# Allegro board LinkingInterfaceV2_1.brd
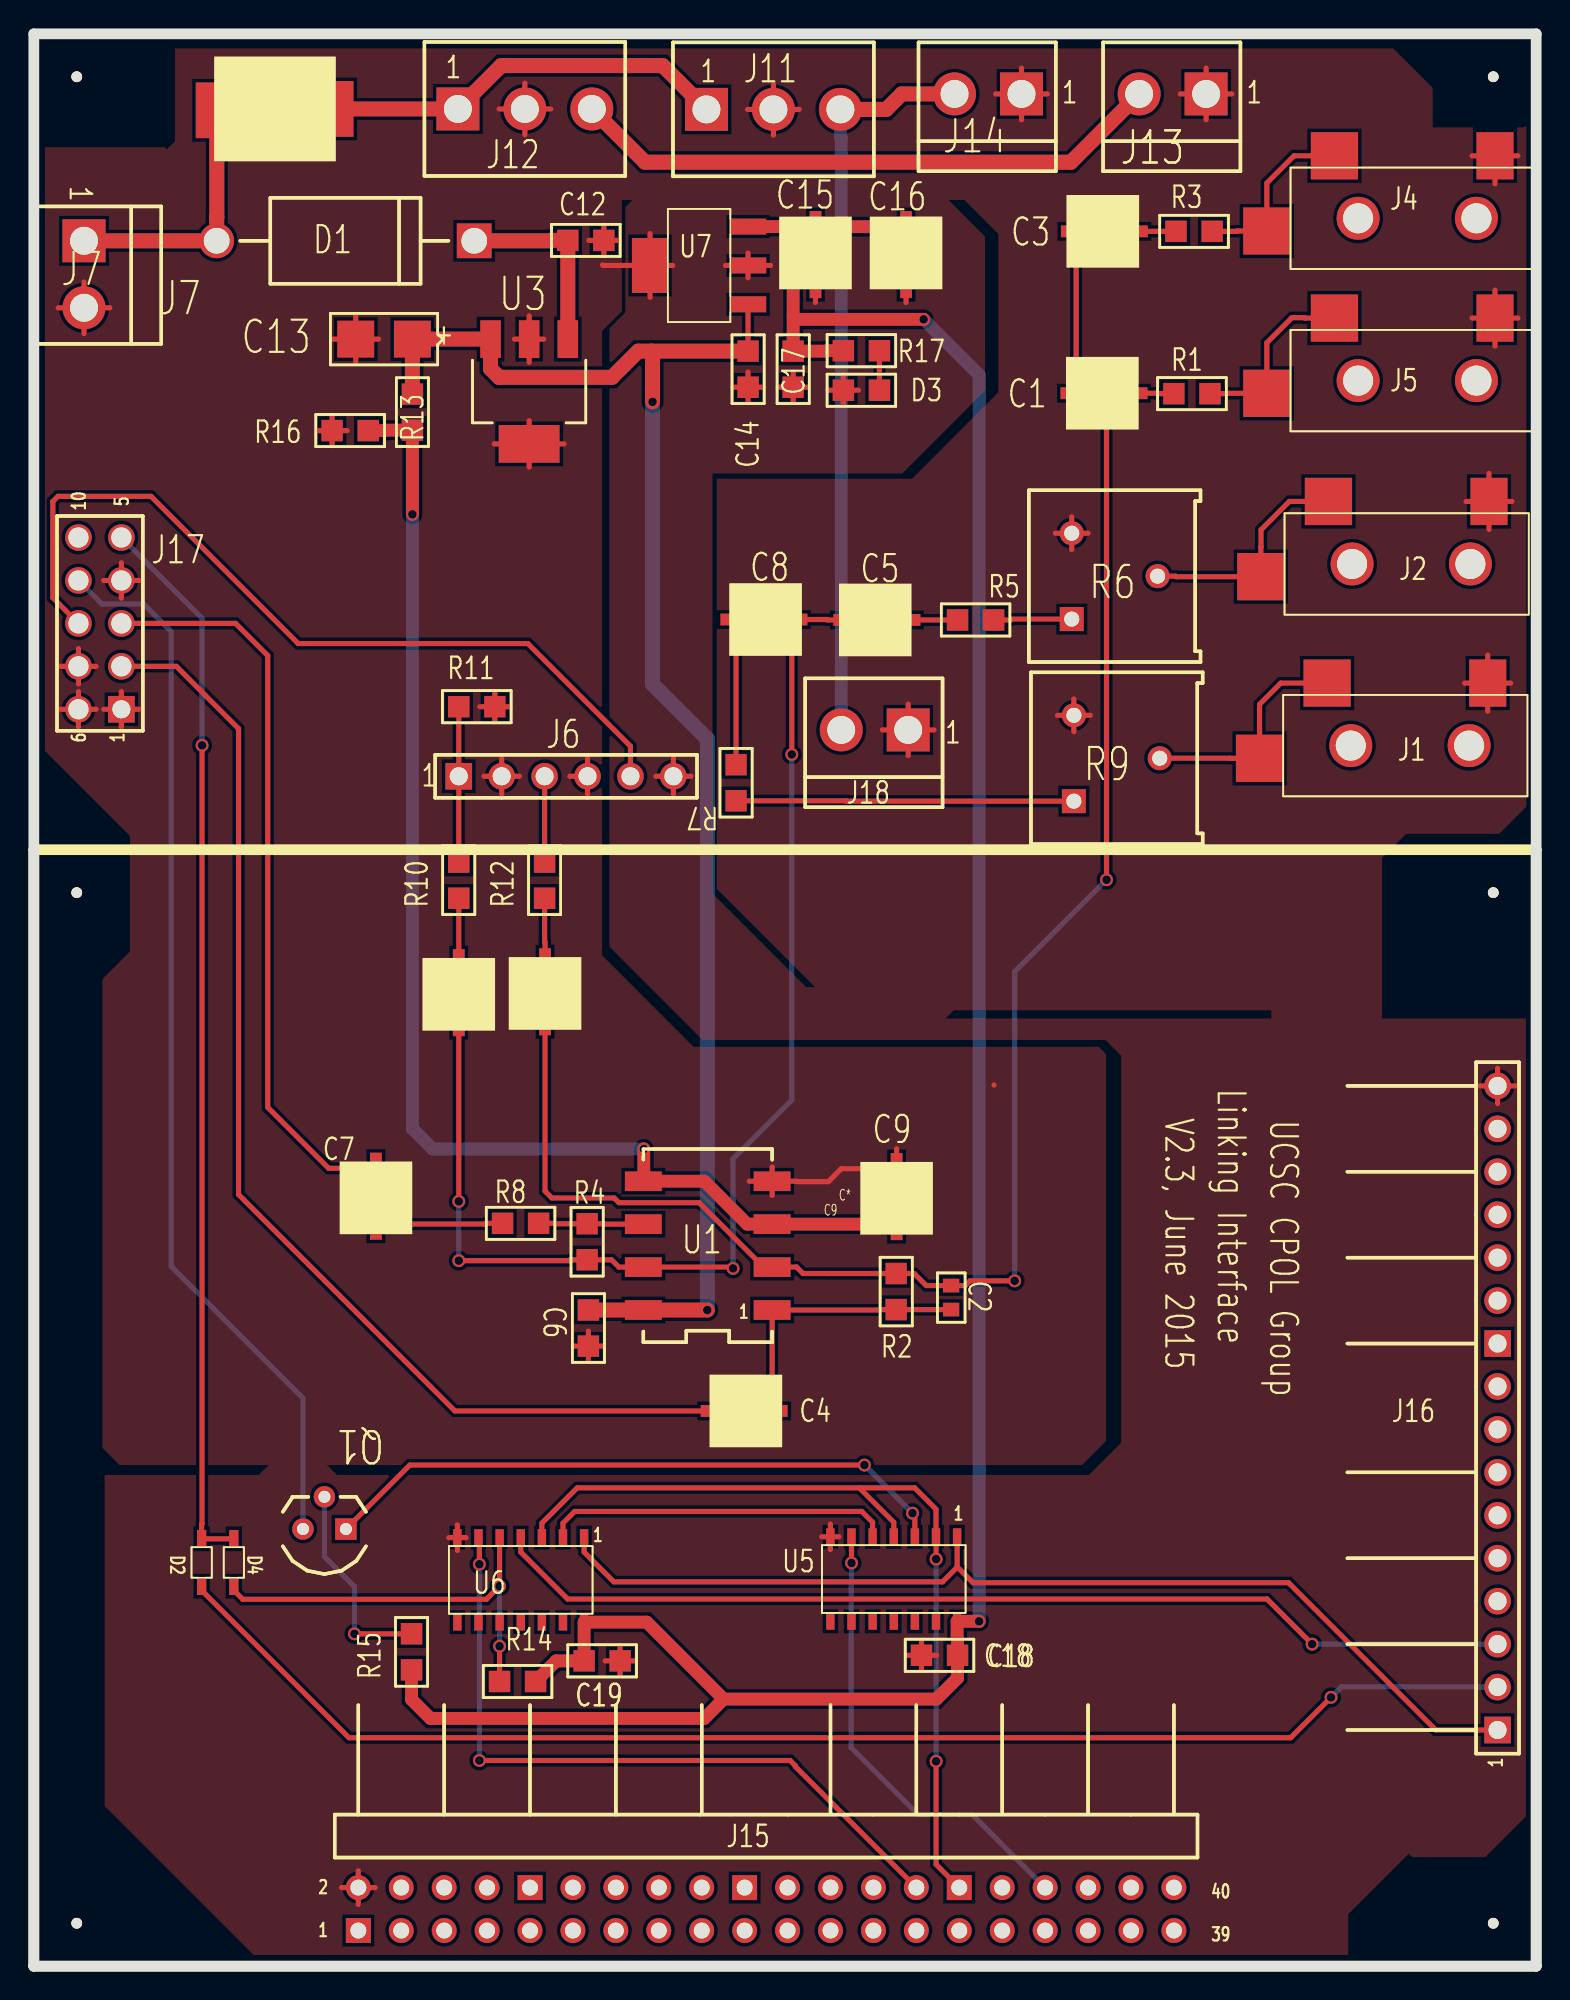
[diagram p0: board, top side]
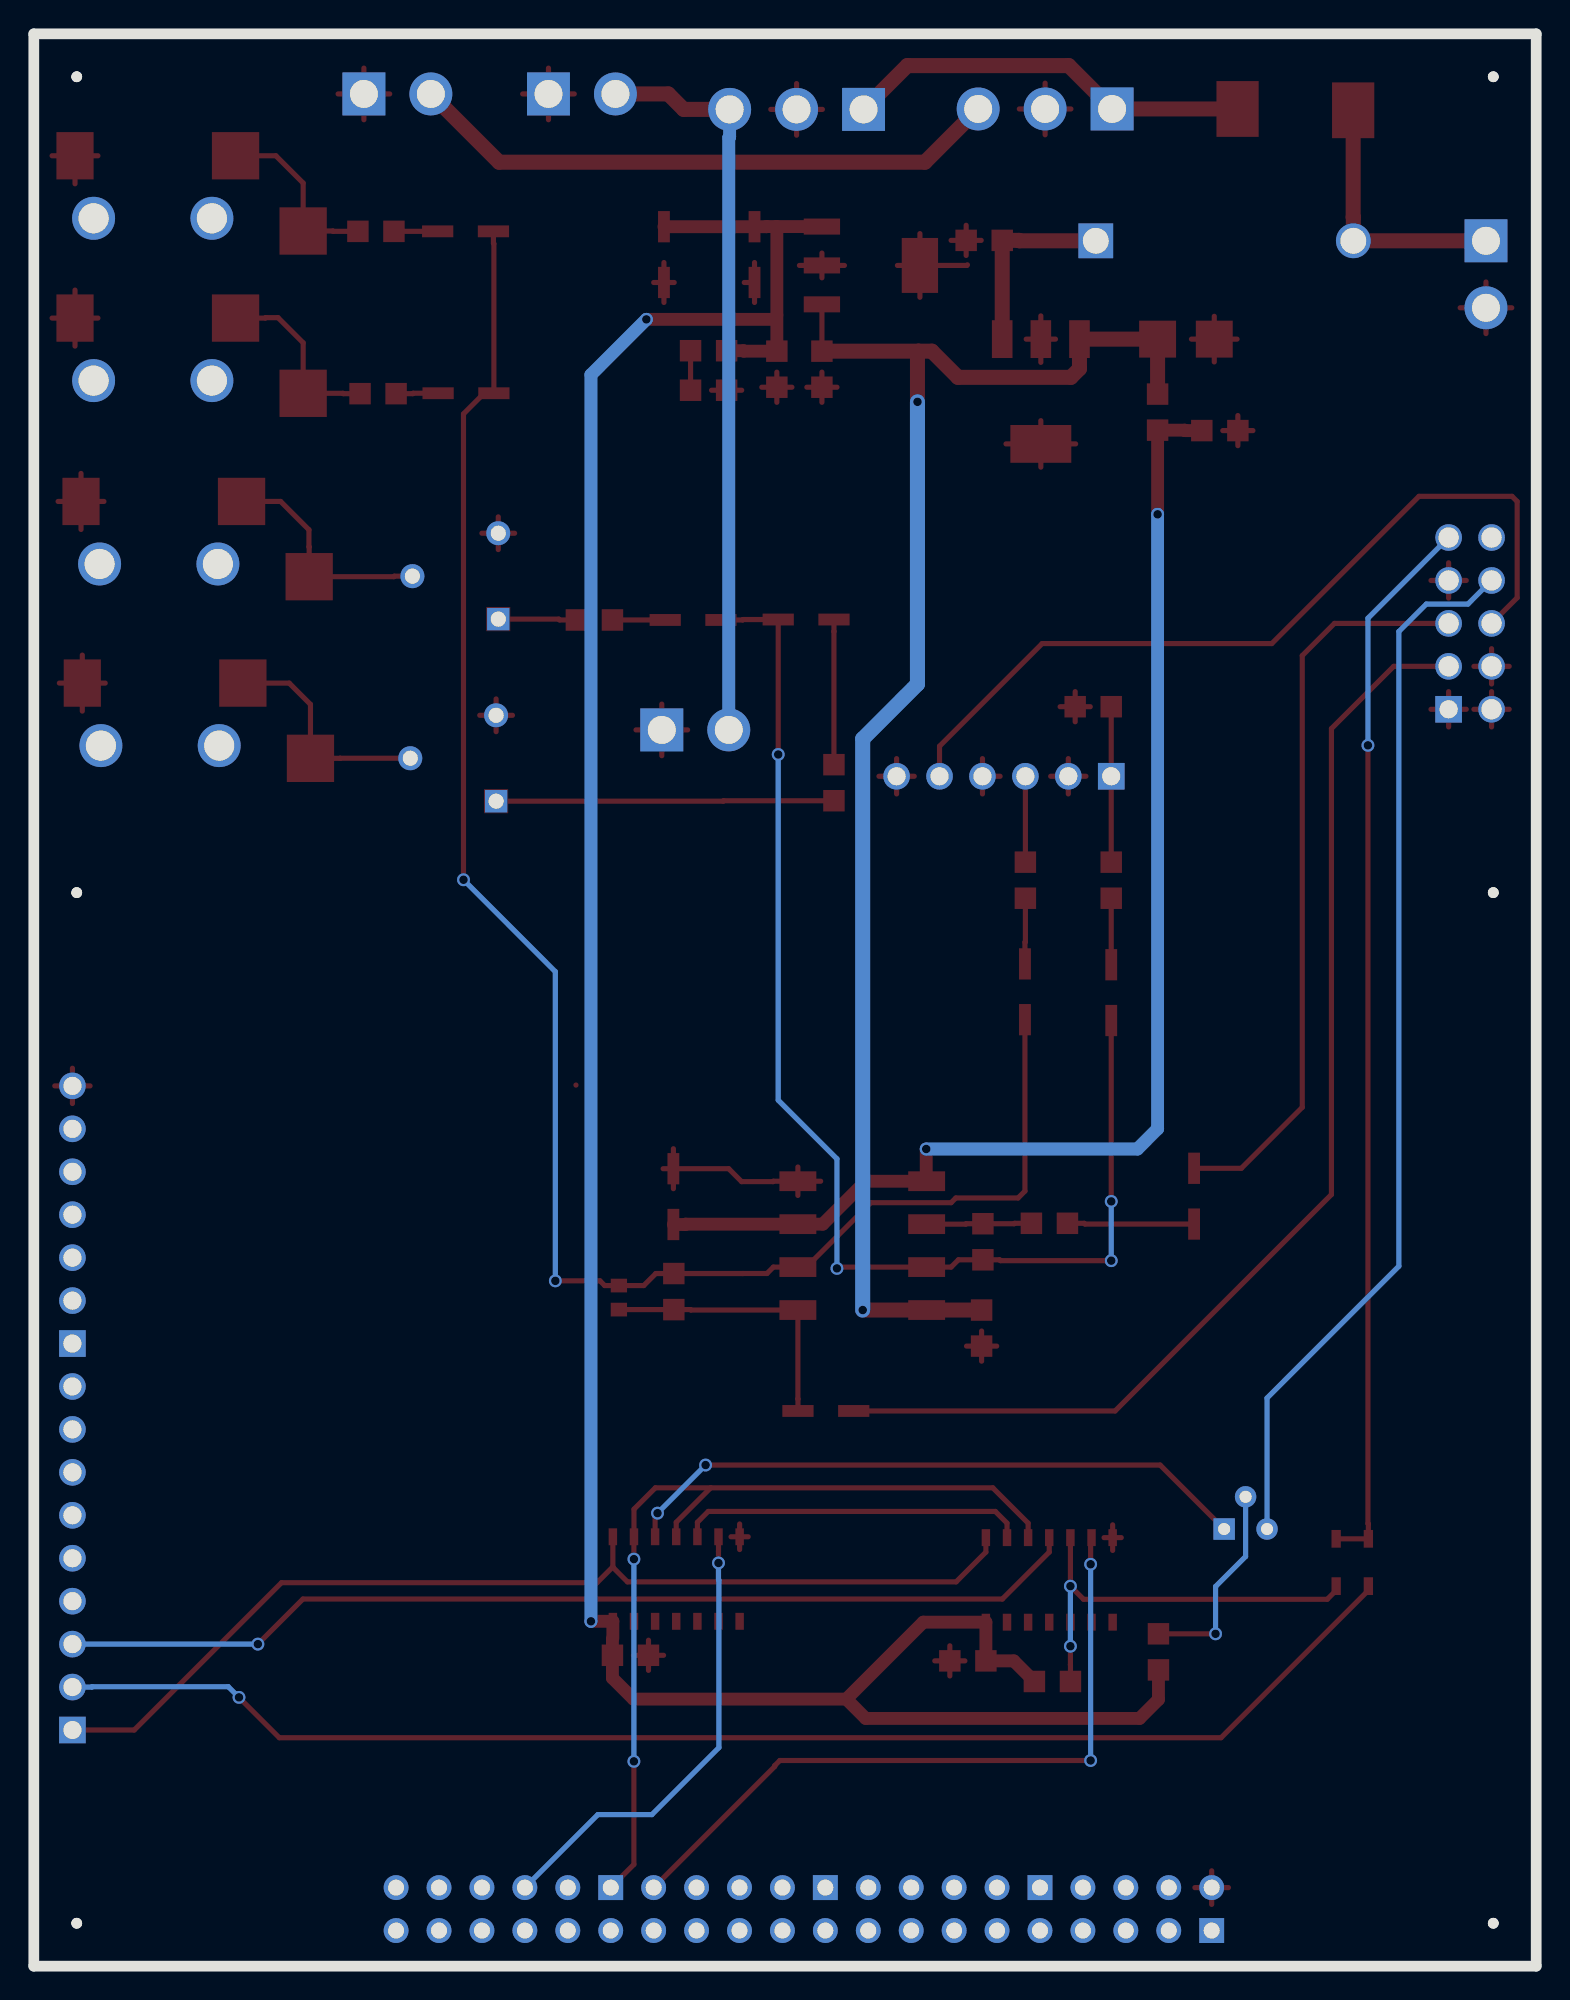
[diagram p1: board, bottom side, seen from below]

Outline 88.9 x 114.3 mm; copper layers: TOP, BOTTOM. Coordinates in mm from the lower left corner of the outline.
Outline path: rectangle 0,0 88.9,114.3 ; 0,114.3 0,0 88.9,0 88.9,114.3 0,114.3

## Placement (name value [footprint] x y rotation side)
C1  10uF  [1_UF_CAP]  61.98 93.04 270 top
C2  100pF  [SMC0603]  54.28 38.84 90 top
C3  10uF  [1_UF_CAP]  62 102.62 270 top
C4  10uF  [1_UF_CAP]  43.38 32.84 90 top
C5  10uF  [1_UF_CAP]  48.54 79.63 270 top
C6  100nF  [SMC0805]  32.82 36.68 90 top
C7  1uF  [1_UF_CAP]  20.24 44.2 0 top
C8  10uF  [1_UF_CAP]  44.55 79.65 90 top
C9  4.7uF  [1_UF_CAP]  51.05 44.17 0 top
C10  10uF  [1_UF_CAP]  25.15 56.24 0 top
C11  10uF  [1_UF_CAP]  30.25 56.29 0 top
C12  470nF  [SMC0805]  31.6 102.08 0 top
C13  22uF/Tant  [EIAB_SMCT3528_12]  22.4 96.24 180 top
C14  100nF  [SMC0805]  42.27 93.4 90 top
C15  10uF  [1_UF_CAP]  46.25 102.59 180 top
C16  10uF  [1_UF_CAP]  51.61 102.59 180 top
C17  100nF  [SMC0805]  44.93 93.4 90 top
C18  100nF  [SMC0805]  52.53 18.39 0 top
C19  100nF  [SMC0805]  32.56 18.06 0 top
D1  SB1245  [DAX600_60D]  10.82 102.06 0 top
D2  1N4148  [1N4148_SOD523]  11.84 22.48 0 top
D3  RED  [SMR0805]  50.04 93.22 180 top
D4  1N4148  [1N4148_SOD523]  9.93 22.48 0 top
D5  -  [B320]  10.87 109.86 0 top
J1  TX_Echo  [35MMJACK]  86.51 97.54 0 top
J2  TX_Allstar  [35MMJACK]  86.51 107.14 0 top
J4  RX_Echo  [35MMJACK]  86.16 86.69 0 top
J5  Rx_Allstar  [35MMJACK]  86.08 75.95 0 top
J6  HEADER 6  [BLKCON100VHTM1SQSW1006]  25.15 70.38 0 top
J7  0.156 VH  [BLKCON156_VHTM1SQ_SW156_2]  2.97 102.06 270 top
J11  HEADER 3  [BLKCON156VHTM1SQSW3123]  39.8 109.83 0 top
J12  HEADER 3  [BLKCON156VHTM1SQSW3123]  25.1 109.86 0 top
J13  0.156 VH  [BLKCON156_VHTM1SQ_SW156_2]  69.37 110.74 180 top
J14  0.156 VH  [BLKCON156_VHTM1SQ_SW156_2]  58.45 110.74 180 top
J15  HEADER 20X2  [BLKCON100RHTM2OEW52540]  19.2 2.11 0 top
J16  HEADER 16  [BLKCON100RHTM1SQSW35016]  86.61 13.97 90 top
J17  HEADER 9  [BCON2DB9_5X2V_100S_42D]  5.18 74.35 90 top
J18  0.156 VH  [BLKCON156_VHTM1SQ_SW156_2]  51.74 73.13 180 top
NOREF  -  [unnamed]  86.36 111.76 180 bottom
NOREF#2  -  [unnamed]  86.36 63.5 180 bottom
NOREF#3  -  [unnamed]  86.36 2.54 180 bottom
NOREF#4  -  [unnamed]  2.54 63.5 180 bottom
NOREF#5  -  [unnamed]  2.54 2.54 180 bottom
NOREF#6  -  [unnamed]  2.54 111.76 180 bottom
Q1  2N2222  [TO92R100]  17.2 25.86 180 top
R1  51k  [SMR0805]  67.46 93.01 0 top
R2  51k  [SMR0805]  51.03 38.84 90 top
R3  51k  [SMR0805]  67.59 102.62 0 top
R4  51k  [SMR0805]  32.74 43.92 270 top
R5  7.5k  [SMR0805]  54.66 79.63 0 top
R6  10k  [VRES18_35D]  63.96 82.22 90 top
R7  7.5k  [SMR0805]  41.55 71.07 270 top
R8  51k  [SMR0805]  27.74 43.94 0 top
R9  10k  [VRES18_35D]  64.08 71.45 90 top
R10  7.5k  [SMR0805]  25.15 63.17 90 top
R11  10k  [SMR0805]  27.28 74.5 180 top
R12  51k  [SMR0805]  30.23 63.17 90 top
R13  51k  [SMR0805]  22.4 90.86 90 top
R14  10k  [SMR0805]  27.56 16.84 0 top
R15  10k  [SMR0805]  22.35 17.53 90 top
R16  51k  [SMR0805]  17.65 90.83 0 top
R17  330  [SMR0805]  50.04 95.55 180 top
U1  TL072  [DIP100B8W300L450]  43.69 38.81 90 top
U3  LM2940 / SOT223  LDO  [SOT223_1234]  31.6 96.24 180 top
U5  74HC08  [74HC0]  54.64 25.4 180 top
U6  74HC04  [74HC0]  32.56 25.35 180 top
U7  LM2936/SO_5  [LM2936_SOT]  42.32 98.3 90 top

## Library data of the parts
C1 C3 C7 C11 = CAPACITOR POL
C2 C6 C12 C14 C17-C19 = C NP
C4 C5 C8-C10 C15 C16 = CAP POL
C13 = C POL
D1 D5 = DIODE SCHOTTKY_0
D2 D4 = 1N4148
D3 = LED
J1 J2 J4 J5 = PHONE JACK-3_2
J6 = HEADER 6
J7 J13 J14 J18 = HEADER 2_4
J11 J12 = HEADER 3
J15 = HEADER 20X2
J16 = HEADER 16
J17 = HEADER 9
Q1 = 2N2222
R1-R5 R7 R8 R10-R17 = RESISTOR
R6 R9 = POT
U1 = TL072_0
U3 = 78L05/TO92_0
U5 = 74HC08_4
U6 = 74HC04_5
U7 = LM2936/SO_13

## Footprints (pads in the part's own frame, mm; a bottom-side part is the same pattern mirrored in y, then rotated)
1_UF_CAP
  rect 0.701x1.849 smd: 1(0,-0.3) 2(0,3)
1N4148_SOD523
  rect 0.551x1.049 smd: 1(0,0) 2(0,2.799)
35MMJACK
  round 2.54 hole 1.778: (-8.151,-3.749) (-1.151,-3.749)
  rect 2.2x2.799 smd: 1(-0.051,-0.051)
  rect 2.799x2.799 smd: 2(-9.55,-0.051) 3(-13.551,-4.501)
74HC0
  rect 0.5x1.001 smd: 1(0,0) 2(1.25,0) 3(2.499,0) 4(3.749,0) 5(5.001,0) 6(6.251,0) 7(7.501,0) 8(7.501,5.001) 9(6.251,5.001) 10(5.001,5.001) 11(3.749,5.001) 12(2.499,5.001) 13(1.25,5.001) 14(0,5.001)
B320
  rect 2.499x3.299 smd: 1(-0.041,-0.079) 2(6.8,0)
BCON2DB9_5X2V_100S_42D
  round 1.575 hole 1.194: (10.16,2.54) 2(2.54,0) 3(5.08,0) 4(7.62,0) 5(10.16,0) 6(0,2.54) 7(2.54,2.54) 8(5.08,2.54) 9(7.62,2.54)
  rect 1.575x1.575 hole 1.067: 1(0,0)
BLKCON100RHTM1SQSW35016
  rect 1.575x1.575 hole 1.067: 1(0,0) 10(22.86,0)
  round 1.575 hole 1.067: 2(2.54,0) 3(5.08,0) 4(7.62,0) 5(10.16,0) 6(12.7,0) 7(15.24,0) 8(17.78,0) 9(20.32,0) 11(25.4,0) 12(27.94,0) 13(30.48,0) 14(33.02,0) 15(35.56,0) 16(38.1,0)
BLKCON100RHTM2OEW52540
  rect 1.473x1.473 hole 0.94: 1(0,0) 10(10.16,2.54) 20(22.86,2.54) 30(35.56,2.54)
  round 1.473 hole 0.94: 2(0,2.54) 3(2.54,0) 4(2.54,2.54) 5(5.08,0) 6(5.08,2.54) 7(7.62,0) 8(7.62,2.54) 9(10.16,0) 11(12.7,0) 12(12.7,2.54) 13(15.24,0) 14(15.24,2.54) 15(17.78,0) 16(17.78,2.54) 17(20.32,0) 18(20.32,2.54) 19(22.86,0) 21(25.4,0) 22(25.4,2.54) 23(27.94,0) 24(27.94,2.54) 25(30.48,0) 26(30.48,2.54) 27(33.02,0) 28(33.02,2.54) 29(35.56,0) 31(38.1,0) 32(38.1,2.54) 33(40.64,0) 34(40.64,2.54) 35(43.18,0) 36(43.18,2.54) 37(45.72,0) 38(45.72,2.54) 39(48.26,0) 40(48.26,2.54)
BLKCON100VHTM1SQSW1006
  rect 1.575x1.575 hole 1.067: 1(0,0)
  round 1.575 hole 1.067: 2(2.54,0) 3(5.08,0) 4(7.62,0) 5(10.16,0) 6(12.7,0)
BLKCON156_VHTM1SQ_SW156_2
  rect 2.54x2.54 hole 1.651: 1(0,0)
  round 2.54 hole 1.651: 2(3.962,0)
BLKCON156VHTM1SQSW3123
  rect 2.54x2.54 hole 1.651: 1(0,0)
  round 2.54 hole 1.651: 2(3.962,0) 3(7.925,0)
DAX600_60D
  round 2.057 hole 1.524: 1(0,0)
  rect 2.057x2.057 hole 1.524: 2(15.24,0)
DIP100B8W300L450
  rect 1.168x2.184 smd: 1(0,0) 2(2.54,0) 3(5.08,0) 4(7.62,0) 5(7.62,7.62) 6(5.08,7.62) 7(2.54,7.62) 8(0,7.62)
EIAB_SMCT3528_12
  rect 2.184x2.184 smd: 1(0,0) 2(3.353,0)
LM2936_SOT
  rect 0.95x2.149 smd: 1(0,0.051) 2(2.301,0.051) 3(4.6,0.051)
  rect 3.251x2.149 smd: 4(2.301,5.85)
SMC0603
  rect 0.813x0.965 smd: 1(0,0) 2(1.422,0)
SMC0805
  rect 1.27x1.27 smd: 1(0,0) 2(2.134,0)
SMR0805
  rect 1.27x1.27 smd: 1(0,0) 2(2.134,0)
SOT223_1234
  rect 1.219x2.235 smd: 1(0,0) 2(2.286,0) 3(4.572,0)
  rect 3.607x2.235 smd: 4(2.286,6.198)
TO92R100
  rect 1.27x1.27 hole 0.711: 1(-1.27,0)
  round 1.27 hole 0.711: 2(0,-1.905) 3(1.27,0)
unnamed
  round 0.635 hole 3.175 unplated: (0,0)
VRES18_35D
  rect 1.422x1.422 hole 0.889: 1(-2.54,2.54)
  round 1.422 hole 0.889: 2(0,-2.54) 3(2.54,2.54)

## Nets
+3.3V: C15.1 C16.1 C17.2(B) C18.2(B) C19.1(A) R14.2 R15.1 R17.2 U5.14(+3.3V) U6.14(+3.3V) U7.3(+3.3V)
+4.5V: C9.1 R13.1 R16.2 U1.3(+IN) U1.5(+IN)
+9V: C6.2(B) C13.1(P) C14.2(B) R13.2 U1.8(+9V) U3.3(+9V) U7.1(+9V)
GND: C6.1(A) C9.2 C12.2(B) C13.2(N) C14.1(A) C15.2 C16.2 C17.1(A) C18.1(A) C19.2(B) D3.2(CATHODE) J1.1 J2.1 J4.1 J5.1 J6.2 J6.4 J6.6 J7.2 J11.2 J12.2 J13.1 J14.1 J15.2 J16.16 J17.1 J17.4 J17.6 J17.7 J18.1 R6.3(B) R9.3(B) R11.1 R16.1 U1.4(GND) U3.2(G1) U3.4(G2) U5.7(GND) U6.7(GND) U7.2(GND#2) U7.4(GND#4)
AUDIO_AUX: C7.2 J17.3
AUDIOOUT: C4.2 J17.2
COS: D2.2 D4.2 J17.5
COS_ALLSTAR: D4.1 J16.2
DTMF_AUDIO: J6.1 R10.2 R11.2
DTMF_TONE_CONFIRMATION: J6.3 R12.2
INHIBIT: J6.5 J17.8
PTT: J17.9 Q1.3(COLLECTOR)
PTT_E: J15.30 U5.2(B) U5.4(A) U6.3(A)
RX_A: J5.2 J5.3 R9.2(WIPER)
RX_E: J4.2 J4.3 R6.2(WIPER)
TX_A: J2.2 J2.3 R3.2
N88559: C1.1 C2.2(B) C3.1 C11.1 R2.2 U1.2(-IN)
N88575: C2.1(A) C4.1 R2.1 U1.1(OUT)
N89923: C5.1 C8.1 C10.1 R4.2 U1.7(OUT)
N90145: C1.2 R1.1
N90149: C3.2 R3.1
N90849: R4.1 R8.2 U1.6(-IN)
N96497: J15.34 U5.6(Y)
N134507: C5.2 R5.1
N134567: C10.2 R10.1
N134575: C8.2 R7.1
N134810: R5.2 R6.1(A)
N196050: J1.2 J1.3 R1.2
N904010: R7.2 R9.1(A)
N908810: C7.1 R8.1
N1797602: Q1.1(EMITTER) U5.3(Y)
N14521945: C12.1(A) D1.2(CATHODE) U3.1(IN)
N14527017: J16.1 U5.1(A) U6.1(A)
N14538770: D1.1(ANODE) D5.1(ANODE) J7.1
N14545130: J16.3 U6.4(Y)
N14551658: C11.2 R12.1
N14592870: J15.28 U6.6(Y)
N14597991: U5.5(B) U6.2(Y)
N14601768: D5.2(CATHODE) J11.1 J12.1
N14603309: J11.3 J14.2 J18.2
N14603313: J12.3 J13.2
N14619662: D2.1 R14.1 U6.5(A)
N145714160: D3.1(ANODE) R17.1
N146226602: Q1.2(BASE) R15.2

Pads without a net: J15 1 3 4 5 6 7 8 9 10 11 12 13 14 15 16 17 18 19 20 21 22 23 24 25 26 27 29 31 32 33 35 36 37 38 39 40; J16 4 5 6 7 8 9 10 11 12 13 14 15; U5 8 9 10 11 12 13; U6 8 9 10 11 12 13

## Via types
v1: diameter 0.762, hole 0.508, TOP to BOTTOM, 25 vias

## Routing (per net, layer and track width the routed paths; a pad name or vN(x,y) marks a point on that pad's centre or on a via; arc(x,y) is an arc through that point)
+3.3V: length 161.9
  TOP w0.305: 54.66,19.38 54.64,19.41 ; 44.93,97.66 45.19,97.41
  TOP w0.762: C16.1 C15.1 45.55,102.89 45.54,102.9 44.96,102.9 ; R17.2 46.91,95.55 46.89,95.53 C17.2 44.93,102.87 44.96,102.9 ; 40.82,15.8 53.42,15.8 54.66,17.04 C18.2 54.66,19.38 ; 40.82,15.8 36.27,20.35 U6.14 C19.1 30.91,18.06 R14.2 ; 40.82,15.8 39.67,14.66 23.47,14.66 22.35,15.77 R15.1 ; 54.64,19.41 U5.14 v1(55.93,20.4) ; 44.96,102.9 U7.3 ; 45.19,97.41 v1(52.65,97.41)
  BOTTOM w0.762: v1(55.93,20.4) 55.93,94.13 v1(52.65,97.41)
+4.5V: length 76.1
  TOP w0.762: v1(36.09,48.34) 36.09,46.46 U1.5 39.67,46.43 42.21,43.89 U1.3 50.33,43.89 50.35,43.87 C9.1 ; v1(22.4,85.88) R13.1 20.8,90.86 20.78,90.83 R16.2
  BOTTOM w0.762: v1(22.4,85.88) 22.4,49.53 23.6,48.34 v1(36.09,48.34)
+9V: length 93.6
  TOP w0.305: C14.2 U7.1
  TOP w0.889: v1(39.85,38.81) U1.8 C6.2 ; R13.2 C13.1 U3.3 27.03,94.49 27.53,93.98 34.21,93.98 35.76,95.53 36.55,95.53 ; 36.55,95.53 C14.2 ; 36.55,95.53 36.61,95.47 v1(36.61,92.53)
  BOTTOM w0.889: v1(39.85,38.81) 39.85,72.59 36.61,75.83 v1(36.61,92.53)
GND: length 189.3
  TOP w0.305: 36.47,98.72 U7.4 ; U7.4 33.69,100.6 33.66,100.63 ; U7.4 37.8,100.6 ; U7.4 36.47,102.48 ; 19.05,94.89 C13.2 ; C13.2 17.7,96.24 ; C13.2 19.05,97.59 ; C13.2 20.4,96.24 ; J15.2 20.2,4.65 ; J15.2 19.2,3.66 ; J15.2 18.21,4.65 ; J15.2 19.2,5.64 ; 33.8,18.06 C19.2 ; C19.2 35.59,18.06 ; C19.2 34.7,18.95 ; C19.2 34.7,17.17 ; J17.7 3.69,76.89 ; J17.7 2.64,77.93 ; J17.7 1.6,76.89 ; J17.7 2.64,75.84 ; J6.6 37.85,71.43 ; J6.6 37.85,69.34 ; J6.6 38.89,70.38 ; J6.6 36.8,70.38 ; 61.42,83.79 R6.3 ; R6.3 62.38,84.76 ; R6.3 60.45,84.76 ; R6.3 61.42,85.73 ; C16.2 52.22,99.59 ; C16.2 51.61,98.41 ; C16.2 51.61,100.77 ; C16.2 51.01,99.59 ; U3.4 29.31,91.42 ; U3.4 31.37,90.04 ; U3.4 29.31,88.67 ; U3.4 27.25,90.04 ; C14.1 43.16,93.4 ; C14.1 41.37,93.4 ; C14.1 42.27,92.5 ; C14.1 42.27,94.29 ; 1.45,98.09 J7.2 ; J7.2 2.97,99.62 ; J7.2 4.5,98.09 ; J7.2 2.97,96.57 ; C12.2 34.62,102.08 ; C12.2 33.73,101.19 ; C12.2 32.84,102.08 ; C12.2 33.73,102.97 ; 86.11,84.98 J4.1 ; J4.1 87.46,86.64 ; J4.1 86.11,88.3 ; J4.1 84.75,86.64 ; J6.4 32.77,71.43 ; J6.4 32.77,69.34 ; J6.4 31.72,70.38 ; J17.1 6.23,74.35 ; J17.1 5.18,73.3 ; J17.1 4.14,74.35 ; J17.1 5.18,75.39 ; 29.06,108.33 J12.2 ; J12.2 29.06,111.38 ; J12.2 27.53,109.86 ; J12.2 30.58,109.86 ; 86.03,74.24 J5.1 ; J5.1 86.03,77.55 ; J5.1 87.39,75.9 ; J5.1 84.67,75.9 ; R9.3 62.51,73.99 ; R9.3 61.54,73.02 ; R9.3 60.58,73.99 ; R9.3 61.54,74.96 ; U1.4 45.14,46.43 45.16,46.41 47.02,46.41 47.78,47.17 C9.2 ; U1.4 43.69,45.59 ; U1.4 43.69,47.27 ; U1.4 42.34,46.43 ; J18.1 51.74,74.65 ; J18.1 50.21,73.13 ; J18.1 51.74,71.6 ; J18.1 53.27,73.13 ; 44.04,93.4 C17.1 ; C17.1 44.93,92.5 ; C17.1 45.82,93.4 ; C17.1 44.93,94.29 ; 31.93,36.68 C6.1 ; C6.1 32.82,37.57 ; C6.1 32.82,35.79 ; C6.1 33.71,36.68 ; J13.1 70.89,110.74 ; J13.1 67.84,110.74 ; J13.1 69.37,112.27 ; J13.1 69.37,109.22 ; C15.2 46.86,99.59 ; C15.2 46.25,100.77 ; C15.2 46.25,98.41 ; 85.57,52.07 J16.16 ; J16.16 87.66,52.07 ; J16.16 86.61,51.03 ; J16.16 86.61,53.11 ; J1.1 87.82,97.49 ; J1.1 86.46,95.83 ; J1.1 86.46,99.14 ; J1.1 85.11,97.49 ; 28.45,96.24 U3.2 ; U3.2 30.18,96.24 ; U3.2 29.31,97.61 ; U3.2 29.31,94.87 ; 51.05,45.99 C9.2 ; C9.2 51.05,48.35 ; C9.2 51.66,47.17 ; 27.69,69.34 J6.2 ; J6.2 27.69,71.43 ; J6.2 28.73,70.38 ; J6.2 26.64,70.38 ; 17.65,89.94 R16.1 ; R16.1 17.65,91.72 ; R16.1 16.76,90.83 ; R16.1 18.54,90.83 ; 51.64,18.39 C18.1 ; C18.1 52.53,17.5 ; C18.1 52.53,19.28 ; C18.1 53.42,18.39 ; J2.1 87.82,107.09 ; J2.1 86.46,105.43 ; J2.1 85.11,107.09 ; 25.06,24.59 U6.7 ; U6.7 25.06,26.11 ; U6.7 24.55,25.35 ; U6.7 25.57,25.35 ; U7.2 43.6,100.6 ; U7.2 42.27,99.87 ; U7.2 42.27,101.33 ; U7.2 40.93,100.6 ; D3.2 48.8,93.22 ; D3.2 47.9,92.33 ; D3.2 47.01,93.22 ; D3.2 47.9,94.11 ; J17.4 6.23,81.97 ; J17.4 5.18,83.01 ; J17.4 5.18,80.92 ; J17.4 4.14,81.97 ; J11.2 45.29,109.83 ; J11.2 42.24,109.83 ; J11.2 43.76,111.36 ; J11.2 43.76,108.3 ; 58.45,109.22 J14.1 ; J14.1 58.45,112.27 ; J14.1 56.92,110.74 ; J14.1 59.97,110.74 ; R11.1 28.17,74.5 ; R11.1 27.28,73.61 ; R11.1 27.28,75.39 ; R11.1 26.39,74.5 ; 2.64,73.3 J17.6 ; J17.6 2.64,75.39 ; J17.6 1.6,74.35 ; J17.6 3.69,74.35 ; U5.7 47.13,26.16 ; U5.7 46.63,25.4 ; U5.7 47.13,24.64 ; U5.7 47.64,25.4 ; 56.82,52.12 56.82,52.12
AUDIO_AUX: length 44.1
  TOP w0.305: J17.3 11.94,79.43 13.84,77.52 13.84,50.8 17.45,47.2 C7.2
AUDIOOUT: length 69.6
  TOP w0.305: J17.2 8.43,76.89 12.12,73.2 12.12,45.64 24.92,32.84 C4.2
COS: length 63.1
  TOP w0.305: D2.2 D4.2 9.93,26.16 9.96,26.18 v1(9.96,72.21)
  BOTTOM w0.305: v1(9.96,72.21) 9.96,79.73 J17.5
COS_ALLSTAR: length 81.8
  TOP w0.305: v1(76.76,15.9) 74.37,13.51 18.65,13.51 9.93,22.23 D4.1
  BOTTOM w0.305: J16.2 85.47,16.51 85.45,16.53 77.39,16.53 v1(76.76,15.9)
DTMF_AUDIO: length 9.2
  TOP w0.305: R11.2 J6.1 R10.2
DTMF_TONE_CONFIRMATION: length 5.1
  TOP w0.305: R12.2 J6.3
INHIBIT: length 50
  TOP w0.305: J6.5 35.31,72.16 29.24,78.23 15.65,78.23 6.94,86.94 1.43,86.94 1.13,86.64 1.13,80.94 J17.8
PTT: length 63.1
  BOTTOM w0.305: J17.9 4.04,80.57 6.5,80.57 8.13,78.94 8.13,41.4 15.93,33.6 Q1.3
PTT_E: length 52.3
  TOP w0.305: 48.85,28.3 52.12,28.3 53.39,27.03 U5.2 53.39,25.39 v1(53.39,24.08) ; 48.85,28.3 50.89,26.26 U5.4 ; 48.85,28.3 32.15,28.3 30.06,26.21 U6.3 ; v1(53.39,12.12) 53.39,6.02 J15.30
  BOTTOM w0.305: v1(53.39,12.12) v1(53.39,24.08)
RX_A: length 13.6
  TOP w0.305: J5.2 73.79,75.9 72.53,74.64 J5.3 70.77,71.45 70.77,71.45 R9.2
RX_E: length 13.6
  TOP w0.305: J4.2 74.3,86.64 72.62,84.96 72.62,83.96 72.61,83.94 J4.3 67.59,82.19 67.56,82.22 R6.2
TX_A: length 10.8
  TOP w0.305: R3.2 71.19,102.62 71.21,102.64 J2.3 72.96,105.47 74.57,107.09 J2.2
N88559: length 105.8
  TOP w0.305: v1(63.47,64.26) 63.47,91.82 62.25,93.04 C1.1 61.68,101.88 61.7,101.91 C3.1 ; C11.1 30.25,45.85 30.66,45.44 34.34,45.44 34.62,45.16 39.37,45.16 43.18,41.35 U1.2 45.14,41.35 45.52,40.97 46.94,40.97 46.94,40.97 R2.2 52.1,40.97 52.81,40.26 C2.2 55.12,40.26 55.4,40.54 v1(58.04,40.54)
  BOTTOM w0.305: v1(63.47,64.26) 58.04,58.83 v1(58.04,40.54)
N88575: length 16.6
  TOP w0.305: C4.1 43.68,33.55 43.69,33.55 U1.1 50.01,38.81 50.04,38.84 R2.1 C2.1
N89923: length 74.8
  TOP w0.305: v1(25.15,41.73) 31.7,41.73 31.75,41.78 R4.2 34.19,41.78 34.62,41.35 U1.7 ; v1(44.85,71.67) C8.1 46.93,79.65 46.96,79.63 C5.1 ; U1.7 36.09,41.33 36.96,41.33 ; U1.7 41.3,41.35 v1(41.38,41.27) ; C10.1 v1(25.15,45.24)
  BOTTOM w0.305: v1(44.85,71.67) 44.85,51.23 41.38,47.75 v1(41.38,41.27) ; v1(25.15,45.24) v1(25.15,41.73)
N90145: length 2.5
  TOP w0.305: C1.2 66.45,93.04 66.47,93.01 R1.1
N90149: length 2.6
  TOP w0.305: R3.1 C3.2
N90849: length 6.2
  TOP w0.305: R8.2 30.86,43.94 30.89,43.92 R4.1 33.73,43.92 33.76,43.89 U1.6
N96497: length 27.4
  TOP w0.305: v1(48.39,23.85) 48.39,24.54 48.38,24.54 U5.6
  BOTTOM w0.305: v1(48.39,23.85) 48.39,22.86 48.36,22.83 48.36,12.93 52.32,8.97 55.52,8.97 J15.34
N134507: length 3.1
  TOP w0.305: C5.2 R5.1
N134567: length 3.9
  TOP w0.305: C10.2 R10.1
N134575: length 8.6
  TOP w0.305: C8.2 41.55,78.95 41.55,78.95 R7.1
N134810: length 4.6
  TOP w0.305: R5.2 57.78,79.63 57.84,79.68 R6.1
N196050: length 11
  TOP w0.305: J1.2 75.21,97.49 75.18,97.51 74.45,97.51 72.96,96.02 J1.3 70.61,93.04 70.59,93.01 R1.2
N904010: length 20
  TOP w0.305: R9.1 48.11,68.91 48.08,68.94 R7.2
N908810: length 7.5
  TOP w0.305: R8.1 26.75,43.94 26.7,43.9 C7.1
N1797602: length 37.7
  TOP w0.305: Q1.1 22.25,29.64 v1(49.15,29.64) ; U5.3 52.14,26.65 v1(51.99,26.8)
  BOTTOM w0.305: v1(51.99,26.8) v1(49.15,29.64)
N14521945: length 11.4
  TOP w0.889: D1.2 30.58,102.06 30.61,102.08 C12.1 U3.1
N14527017: length 61.8
  TOP w0.305: 54.64,23.62 54.64,23.6 53.77,22.73 34.32,22.73 32.56,24.49 U6.1 ; 54.64,23.62 55.58,22.68 74.24,22.68 82.96,13.97 J16.1 ; 54.64,23.62 U5.1
N14538770: length 15.6
  TOP w0.889: D5.1 10.83,103.45 10.82,103.44 D1.1 J7.1
N14545130: length 60.9
  TOP w0.305: U6.4 28.81,24.49 31.59,21.72 72.97,21.72 v1(75.64,19.05)
  BOTTOM w0.305: J16.3 v1(75.64,19.05)
N14551658: length 3.9
  TOP w0.305: R12.1 30.23,60.59 30.25,60.57 C11.2
N14592870: length 42.2
  TOP w0.305: v1(26.37,23.77) 26.37,25.3 U6.6 ; J15.28 45.06,11.81 45.06,11.86 44.75,12.17 v1(26.37,12.17)
  BOTTOM w0.305: v1(26.37,12.17) v1(26.37,23.77)
N14597991: length 20.6
  TOP w0.305: U5.5 49.63,26.26 48.99,26.9 32,26.9 31.31,26.21 U6.2
N14601768: length 24.3
  TOP w0.889: D5.2 J12.1 27.66,112.42 37.21,112.42 J11.1
N14603309: length 43.9
  TOP w0.889: J11.3 50.44,109.83 51.36,110.74 J14.2
  BOTTOM w0.762: J11.3 47.73,108.2 47.78,108.15 J18.2
N14603313: length 35.4
  TOP w0.889: J13.2 61.37,106.71 36.17,106.71 J12.3
N14619662: length 25
  TOP w0.305: U6.5 v1(27.56,22.48) 26.78,21.7 12.36,21.7 11.84,22.23 D2.1 ; v1(27.56,18.93) 27.56,17.83 27.56,17.83 R14.1
  BOTTOM w0.305: v1(27.56,22.48) v1(27.56,18.93)
N145714160: length 2.3
  TOP w0.305: R17.1 D3.1
N146226602: length 12.2
  TOP w0.305: v1(18.97,19.66) R15.2
  BOTTOM w0.305: Q1.2 17.2,24.23 18.97,22.45 v1(18.97,19.66)

## Copper pours and planes (outline as drawn; the poured copper is in the pictures)
GND on TOP: 62.03,29.64 5.08,29.64 4.06,30.66 4.06,58.39 5.69,60.02 5.69,66.85 0.66,71.88 0.66,107.59 7.75,107.59 7.87,107.47 8.36,107.95 8.36,113.44 80.44,113.44 82.78,111.1 82.78,108.76 88.16,108.76 88.32,108.92 88.32,68.58 86.72,66.98 81.2,66.98 79.78,65.56 79.78,55.78 73.41,55.78 73.23,55.96 73.23,56.54 54.43,56.54 53.95,56.06 53.95,55.75 48.39,55.75 40.41,63.73 40.41,87.99 51.97,87.99 57.07,93.09 57.07,102.46 55.07,104.47 34.82,104.47 34.8,104.44 34.8,97.89 33.63,96.72 33.63,59.79 39.04,54.38 63.02,54.38 63.45,53.95 63.45,31.06
GND on TOP: 4.19,29.06 13.31,29.06 14.78,30.53 16.46,30.53 17.93,29.06 62.43,29.06 64.34,30.96 64.34,53.85 63.4,54.79 39.57,54.79 34.06,60.3 34.06,96.88 35,97.82 35,104.04 35.76,104.8 53.8,104.8 56.29,102.31 56.29,93.19 51.38,88.29 40.16,88.29 40.16,63.45 45.69,57.91 49.25,57.91 51.1,56.06 88.29,56.06 88.29,8.86 85.88,6.45 81.56,6.45 81.36,6.65 77.77,3.07 77.77,0.66 13,0.66 4.19,9.47

## Text on the board
Board Geometry/Soldermask Bottom: SMB
Ref Des/Silkscreen Bottom: SSB
TOP: TOP
Board Geometry/Soldermask Top: SMT
Ref Des/Silkscreen Top: 2 | 1 | 40 | 39 | D2 | D4 | C7 | C10 | U6 | U7 | J15 | U5 | C4 | J18 | J4 | J5 | J16 | J1 | J2 | C2 | J17 | D5 | D1 | J12 | J6 | U1 | J11 | C8 | C15 | C5 | C16 | C9 | C1 | C3 | V2.3, June 2015 | Linking Interface | UCSC CPOL Group | SST
COMPVAL_TYPE_TOP: FIGURE | SIZE | 70.0 | 65.0 | 60.0 | 47.0 | 42.0 | 37.0 | 35.0 | 28.0 | 20.0 | 125.0 | DRILL CHART: TOP to BOTTOM | ALL UNITS ARE IN MILS | PLATED | NON-PLATED | QTY | 8 | 14 | 1 | 9 | 23 | 40 | 6 | 3 | 25
User.5: BOTTOM
User.6: MECH
